# Altium PCB KeyBoard-RP2040.PcbDoc
Units mil, origin at the board's own origin, x right, y up, seen from the top; angles counter-clockwise.
Board outline 6000 x 4000 mil, 2 copper layers (Top Layer, Bottom Layer); 101 components, 89 nets, 360 pads, 0 vias.
Unrouted connection lines stored in the file: 183.
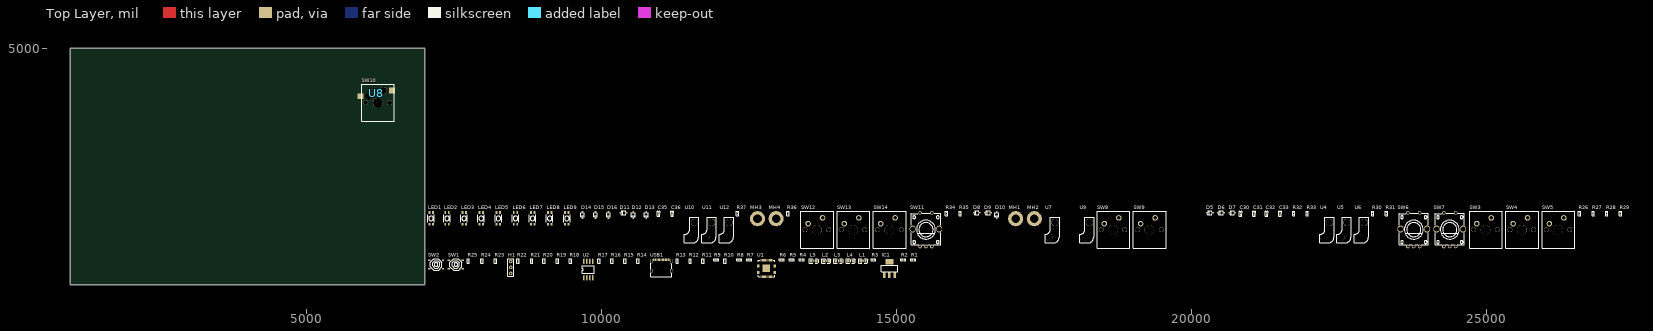
[diagram p0: Top Layer view]
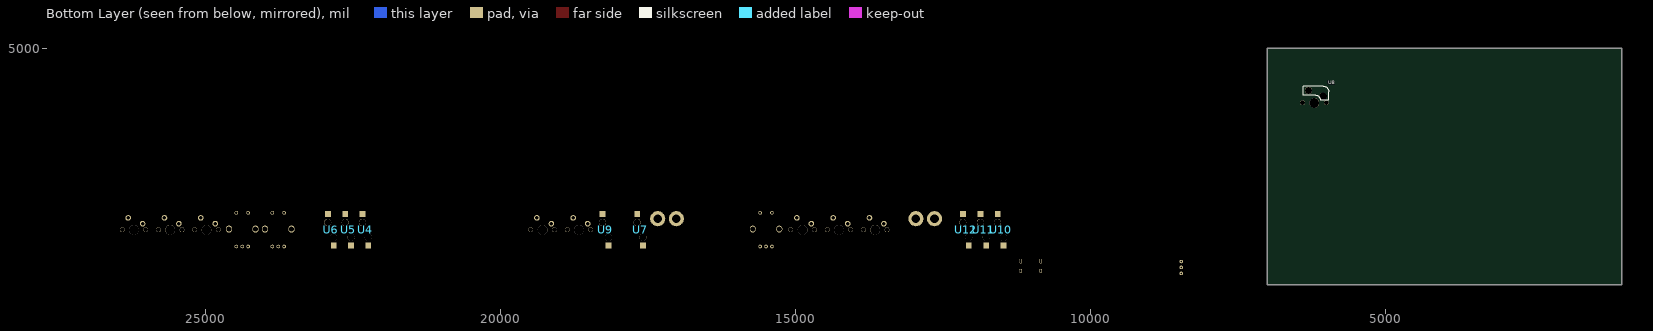
[diagram p1: Bottom Layer view, seen from below]

## Layer stack, top to bottom
Top Solder: solder mask 0.4, Solder Resist, Dk 3.5
Top Layer: signal copper 1.4
Dielectric 1: dielectric 12.6, FR-4, Dk 4.8
Bottom Layer: signal copper 1.4
Bottom Solder: solder mask 0.4, Solder Resist, Dk 3.5

## Board outline
1000,1000 7000,1000 7000,5000 1000,5000

## Design rules (kind name [scope] priority, off if disabled: settings)
Clearance [All] p1: gap=10 ignorepadtopadclearanceinfootprint=FALSE except(0: Arc-Hole Track-Hole SMDPad-Hole THPad-Hole Via-Hole Fill-Hole Poly-Hole Region-Hole Text-Hole)
PolygonConnect [All] p1: connectstyle=Relief reliefconductorwidth=10 reliefentries=4 polygonreliefangle="90 Angle" airgapwidth=10
RoomDefinition KeyBoard-RP2040_P2 [InComponentClass('KeyBoard-RP2040_P2')] p1: confinementstyle=ConfineIn formatcopy=TRUE lockcomponents=FALSE outline 7045,1600 27425,1600 27425,2355 7045,2355
RoomDefinition KeyBoard-RP2040_P1 [InComponentClass('KeyBoard-RP2040_P1')] p2: confinementstyle=ConfineIn formatcopy=TRUE lockcomponents=FALSE outline 7045,1060 15345,1060 15345,1550 7045,1550
RoutingVias [All] p1: holewidth=28 width=50 viastyle="Through Hole" minholewidth=28 minwidth=50 maxholewidth=28 maxwidth=50
SolderMaskExpansion [All] p1: expansion=4 istentingtop=FALSE
Width [All] p1: maxlimit=10 minlimit=10 preferedwidth=10
30 further rules are at their usual default settings.

## Classes and differential pairs
component class KeyBoard-RP2040_P2: C28 C29 C30 C31 C32 C33 C34 C35 C36 C37 C38 C39 C40 C41 C42 C43 C44 C45 D5 D6 D7 D8 D9 D10 D11 D12 D13 D14 D15 D16 LED1 LED2 LED3 LED4 LED5 LED6 LED7 LED8 LED9 MH1 MH2 MH3 MH4 R26 R27 R28 R29 R30 R31 R32 R33 R34 R35 R36 R37 SW3 SW4 SW5 SW6 SW7 SW8 SW9 SW10 SW11 SW12 SW13 SW14 U4 U5 U6 U7 U8 U9 U10 U11 U12
component class KeyBoard-RP2040_P1: C1 C2 C3 C4 C5 C6 C7 C8 C9 C10 C11 C12 C13 C14 C15 C16 C17 C18 C19 C20 C21 C22 C23 C24 C25 C26 C27 D1 D2 D3 D4 H1 IC1 L1 L2 L3 L4 L5 R1 R2 R3 R4 R5 R6 R7 R8 R9 R10 R11 R12 R13 R14 R15 R16 R17 R18 R19 R20 R21 R22 R23 R24 R25 SW1 SW2 U1 U2 U3 USB1 X1

## Components (designator, comment, footprint, x,y, rotation, side; value= is the part's Value field where it differs from the comment)
C30 "10nF" "SMD 0.79 0.54" 20825,2200 r90 top
C31 "10nF" "SMD 0.79 0.54" 21055,2200 r90 top
C32 "10nF" "SMD 0.79 0.54" 21265,2200 r90 top
C33 "10nF" "SMD 0.79 0.54" 21495,2200 r90 top
C35 "10nF" "SMD 0.79 0.54" 10965,2200 r90 top
C36 "10nF" "SMD 0.79 0.54" 11195,2200 r90 top
D5 "Diode" Diode 20305,2215 r0 top
D6 "Diode" Diode 20495,2215 r0 top
D7 "Diode" Diode 20685,2215 r0 top
D8 "Diode" Diode 16355,2215 r0 top
D9 "Diode" Diode 16545,2215 r0 top
D10 "Diode" Diode 16695,2180 r90 top
D11 "Diode" Diode 10370,2215 r0 top
D12 "Diode" Diode 10535,2180 r90 top
D13 "Diode" Diode 10755,2180 r90 top
D14 "Diode" Diode 9675,2180 r90 top
D15 "Diode" Diode 9895,2180 r90 top
D16 "Diode" Diode 10115,2180 r90 top
H1 "Header 3P 2.54" "Header 1x3" 8460,1290 r90 top
IC1 "LM3940IMP" LM39 14875,1270 r0 top
L1 "LED" LED 14430,1400 r0 top
L2 "R" LED 13805,1400 r0 top
L3 "G" LED 14010,1400 r0 top
L4 "B" LED 14220,1400 r0 top
L5 "LED" LED 13595,1400 r0 top
LED1 "SK6812MINI-E" LED-SK6812MINI-E 7110,2120 r90 top
LED2 "SK6812MINI-E" LED-SK6812MINI-E 7380,2120 r90 top
LED3 "SK6812MINI-E" LED-SK6812MINI-E 7670,2120 r90 top
LED4 "SK6812MINI-E" LED-SK6812MINI-E 7960,2120 r90 top
LED5 "SK6812MINI-E" LED-SK6812MINI-E 8250,2120 r90 top
LED6 "SK6812MINI-E" LED-SK6812MINI-E 8540,2120 r90 top
LED7 "SK6812MINI-E" LED-SK6812MINI-E 8830,2120 r90 top
LED8 "SK6812MINI-E" LED-SK6812MINI-E 9120,2120 r90 top
LED9 "SK6812MINI-E" LED-SK6812MINI-E 9410,2120 r90 top
MH1 "HOLE" Hole 17015,2115 r0 top
MH2 "HOLE" Hole 17330,2115 r0 top
MH3 "HOLE" Hole 12640,2115 r0 top
MH4 "HOLE" Hole 12955,2115 r0 top
R1 "200R" "SMD 0.566 0.54" 15280,1420 r0 top
R2 "1K" "SMD 0.566 0.54" 15110,1420 r0 top
R3 "1K" "SMD 0.566 0.54" 14605,1420 r0 top
R4 "1K" "SMD 0.566 0.54" 13390,1420 r0 top
R5 "1K" "SMD 0.566 0.54" 13220,1420 r0 top
R6 "1K" "SMD 0.566 0.54" 13050,1420 r0 top
R7 "27R" "SMD 0.566 0.54" 12500,1420 r0 top
R8 "27R" "SMD 0.566 0.54" 12330,1420 r0 top
R9 "27R" "SMD 0.566 0.54" 11940,1420 r0 top
R10 "27R" "SMD 0.566 0.54" 12090,1400 r90 top
R11 "100M" "SMD 0.566 0.54" 11720,1400 r90 top
R12 "27R" "SMD 0.566 0.54" 11500,1400 r90 top
R13 "1K" "SMD 0.566 0.54" 11280,1400 r90 top
R14 "1K" "SMD 0.566 0.54" 10615,1400 r90 top
R15 "1K" "SMD 0.566 0.54" 10395,1400 r90 top
R16 "5.1K" "SMD 0.566 0.54" 10175,1400 r90 top
R17 "5.1K" "SMD 0.566 0.54" 9955,1400 r90 top
R18 "27R" "SMD 0.566 0.54" 9475,1400 r90 top
R19 "1K" "SMD 0.566 0.54" 9255,1400 r90 top
R20 "1M" "SMD 0.566 0.54" 9025,1400 r90 top
R21 "1K" "SMD 0.566 0.54" 8815,1400 r90 top
R22 "10K" "SMD 0.566 0.54" 8585,1400 r90 top
R23 "100K" "SMD 0.566 0.54" 8200,1400 r90 top
R24 "1K" "SMD 0.566 0.54" 7970,1400 r90 top
R25 "1K" "SMD 0.566 0.54" 7740,1400 r90 top
R26 "10K" "SMD 0.566 0.54" 26570,2205 r90 top
R27 "10K" "SMD 0.566 0.54" 26800,2205 r90 top
R28 "10K" "SMD 0.566 0.54" 27030,2205 r90 top
R29 "10K" "SMD 0.566 0.54" 27260,2205 r90 top
R30 "10K" "SMD 0.566 0.54" 23065,2205 r90 top
R31 "10K" "SMD 0.566 0.54" 23295,2205 r90 top
R32 "10K" "SMD 0.566 0.54" 21725,2205 r90 top
R33 "10K" "SMD 0.566 0.54" 21955,2205 r90 top
R34 "10K" "SMD 0.566 0.54" 15845,2205 r90 top
R35 "10K" "SMD 0.566 0.54" 16075,2205 r90 top
R36 "10K" "SMD 0.566 0.54" 13160,2205 r90 top
R37 "10K" "SMD 0.566 0.54" 12300,2205 r90 top
SW1 "BUTTON" Button 7530,1340 r0 top
SW2 "BUTTON" Button 7195,1340 r0 top
SW3 "CPG151101S21" CPG151101S21 24975,1925 r0 top
SW4 "CPG151101S21" CPG151101S21 25590,1925 r0 top
SW5 "CPG151101S21" CPG151101S21 26205,1925 r0 top
SW6 "PEC12R-4120F-S0012" SW-encoder 23760,1930 r0 top
SW7 "PEC12R-4120F-S0012" SW-encoder 24370,1930 r0 top
SW8 "CPG151101S21" CPG151101S21 18665,1925 r0 top
SW9 "CPG151101S21" CPG151101S21 19280,1925 r0 top
SW10 "CPG151101S21" CPG151101S21 6205,4077.01 r0 top
SW11 "PEC12R-4120F-S0012" SW-encoder 15495,1930 r0 top
SW12 "CPG151101S21" CPG151101S21 13645,1925 r0 top
SW13 "CPG151101S21" CPG151101S21 14260,1925 r0 top
SW14 "CPG151101S21" CPG151101S21 14875,1925 r0 top
U1 "RP2040" RP2040 12790,1275 r0 top
U2 "W25Q128JVS" W25Q128JVS 9700,1115 r90 top
U4 "CPG151101S11" CPG151101S11 22320,1905 r90 top
U5 "CPG151101S11" CPG151101S11 22610,1905 r90 top
U6 "CPG151101S11" CPG151101S11 22905,1905 r90 top
U7 "CPG151101S11" CPG151101S11 17665,1905 r90 top
U8 "CPG151101S11" CPG151101S11 6160,4275 r0 bottom
U9 "CPG151101S11" CPG151101S11 18250,1905 r90 top
U10 "CPG151101S11" CPG151101S11 11555,1905 r90 top
U11 "CPG151101S11" CPG151101S11 11850,1905 r90 top
U12 "CPG151101S11" CPG151101S11 12145,1905 r90 top
USB1 "USB C" USB-C 11010,1325 r0 top

## Footprints (in the part's own frame and the unit in brackets; to place one, negate y for a bottom-side part, rotate by r counter-clockwise, add the part's x,y. Pads: shape width x height; smd on the part's side, far side on the other; paste and mask are expansions set on the pad)
Button [mm]
  rect 1x0.75 smd: 1(-3,1.85) 2(3,1.85) 3(-3,-1.85) 4(3,-1.85)
  silkscreen extent -2.54,-2.54 2.54,2.54
CPG151101S11 [mm]
  rect 2.55x2.5 smd far side: 1(-6.217,2.159) 2(7.296,-0.33)
  round 3 hole 3: ""(-2.667,2.159) ""(3.683,-0.381)
  silkscreen extent -5.08,-2.16 6.01,3.89, body extent -6.37,-2.2 8.15,3.75, height 3.22
CPG151101S21 [mm]
  round 2.413 hole 1.5: 1(-3.759,2.692) 2(2.464,5.182)
  round 2 hole 2: ""(-5.08,0.076) ""(5.08,0.076)
  round 4.2 hole 4.2: ""(0,0)
  silkscreen extent -6.86,-7.95 7.24,8.03, body extent -7,-7.72 6.95,7.88, height 15.25
Diode [mm]
  rect 1x0.75 smd: 1(-1.173,0) 2(1.173,0)
  silkscreen extent -0.9,-0.8 0.9,0.8
"Header 1x3" [mm]
  oval 1.5x1.524 hole 0.8: 1(-2.54,0) 2(0,0) 3(2.54,0)
  silkscreen extent -3.81,-1.27 3.81,1.27
Hole [mm]
  round 6.5 hole 3.7: 1(0,0)
LED [mm]
  rect 1x1.4 smd: 1(-1.05,0) 2(1.05,0)
  silkscreen extent -1.91,-1.02 2.03,1.02
LED-SK6812MINI-E [mm]
  rect 1.2x0.82 smd: 1(-2.5,0.75) 2(-2.5,-0.75) 3(2.5,0.75) 4(2.5,-0.75)
  silkscreen extent -1.6,-1.4 1.6,1.4
LM39 [mm]
  rect 1.05x2.465 smd: 1(-2.3,-2.731) 2(0,-2.731) 3(2.3,-2.731)
  rect 3.54x2.465 smd: 4(0,2.985)
  silkscreen extent -3.56,-1.27 3.56,1.52
RP2040 [mm]
  rect 1.1x0.2 smd: 1(-3.55,2.6) 2(-3.55,2.2) 3(-3.55,1.8) 4(-3.55,1.4) 5(-3.55,1) 6(-3.55,0.6) 7(-3.55,0.2) 8(-3.55,-0.2) 9(-3.55,-0.6) 10(-3.55,-1) 11(-3.55,-1.4) 12(-3.55,-1.8) 13(-3.55,-2.2) 14(-3.55,-2.6) 29(3.55,-2.6) 30(3.55,-2.2) 31(3.55,-1.8) 32(3.55,-1.4) 33(3.55,-1) 34(3.55,-0.6) 35(3.55,-0.2) 36(3.55,0.2) 37(3.55,0.6) 38(3.55,1) 39(3.55,1.4) 40(3.55,1.8) 41(3.55,2.2) 42(3.55,2.6)
  rect 0.2x1.1 smd: 15(-2.6,-3.55) 16(-2.2,-3.55) 17(-1.8,-3.55) 18(-1.4,-3.55) 19(-1,-3.55) 20(-0.6,-3.55) 21(-0.2,-3.55) 22(0.2,-3.55) 23(0.6,-3.55) 24(1,-3.55) 25(1.4,-3.55) 26(1.8,-3.55) 27(2.2,-3.55) 28(2.6,-3.55) 43(2.6,3.55) 44(2.2,3.55) 45(1.8,3.55) 46(1.4,3.55) 47(1,3.55) 48(0.6,3.55) 49(0.2,3.55) 50(-0.2,3.55) 51(-0.6,3.55) 52(-1,3.55) 53(-1.4,3.55) 54(-1.8,3.55) 55(-2.2,3.55) 56(-2.6,3.55)
  rect 3.2x3.2 smd: 57(0,0)
  round 0.254 on Top Overlay: ""(-3.937,3.175)
  silkscreen extent -3.56,-3.56 3.56,3.56, body extent -3.5,-3.5 3.5,3.5, height 0.9
"SMD 0.79 0.54" [mm]
  rect 0.79x0.54 smd: 1(-0.545,0) 2(0.545,0)
  silkscreen extent -1.15,-0.51 1.15,0.51
"SMD 0.566 0.54" [mm]
  rect 0.566x0.54 smd: 1(-0.433,0) 2(0.433,0)
  silkscreen extent -1.02,-0.51 1.02,0.51
SW-encoder [mm]
  round 1.524 hole 0.914: 1(-2.54,7.25) 2(2.54,7.25) 5(-2.54,-7.25) 6(0,-7.25) 7(2.54,-7.25)
  oval 2.6x3 hole 1.8 slot 2 at 0 deg: 3(-5.7,0.25) 4(5.7,0.25)
  silkscreen extent -6.25,-6.5 6.25,7.01
USB-C [mm]
  rect 0.55x1.1 smd: 1(-3.2,2.375) 2(-2.4,2.375) 11(2.4,2.375) 12(3.2,2.375)
  rect 0.3x1.1 smd: 3(-1.75,2.375) 3(-1.75,2.375) 4(-1.25,2.375) 5(-0.75,2.375) 6(-0.25,2.375) 7(0.25,2.375) 8(0.75,2.375) 9(1.25,2.375) 10(1.75,2.375)
  oval 1.2x1.8 hole 1.2 slot 0.6 at 0 deg: 13(-4.325,-2.375) 14(4.325,-2.375)
  oval 1.1x2 hole 1.5 slot 0.6 at 0 deg: 13(-4.325,1.825) 14(4.325,1.825)
  silkscreen extent -4.45,-4.92 4.45,0.89
W25Q128JVS [mm]
  oval 2.25x0.63 smd: 1(0,0) 2(0,-1.27) 3(0,-2.54) 4(0,-3.81) 5(7.06,-3.81) 6(7.06,-2.54) 7(7.06,-1.27) 8(7.06,0)
  silkscreen extent 1.96,-4.44 5.1,0.64

## Part data
C30 C31 C32 C33 C35 C36: library part "CAP 10nF", "SMD"
D5 D6 D7 D8 D9 D10 D11 D12 D13 D14 D15 D16 SW1 SW2 U2: "SMD"
H1: library part "Header 1x3", "THT"
IC1: "SOP"
L1 L2 L3 L4 L5: library part LED2
LED1 LED2 LED3 LED4 LED5 LED6 LED7 LED8 LED9: library part LED-SK6812MINI-E, "RGB 3.7V~5.5V 0.6mA"
R1: library part "RES 200R", "SMD"
R2 R3 R4 R5 R6 R13 R14 R15 R19 R21 R24 R25: library part "RES 1K", "SMD"
R7 R8 R9 R10 R12 R18: library part "Res 27R", "SMD"
R11: library part "RES 100M", "SMD"
R16 R17: library part "RES 5.1K", "SMD"
R20: library part "RES 1M", "SMD"
R22 R26 R27 R28 R29 R30 R31 R32 R33 R34 R35 R36 R37: library part "RES 10K", "SMD"
R23: library part "RES 100K", "SMD"
SW3 SW4 SW5 SW8 SW9 SW10 SW12 SW13 SW14: library part SW-CPG151101S21
SW6 SW7 SW11: library part Encoder-PEC12R
U1: library part "Rasberry Pi Pico-RP2040", "RP2040 chip for Raspberry Pi Pico - ARM® Cortex®-M0+ MCU 32-Bit"
U4 U5 U6 U7 U8 U9 U10 U11 U12: library part SW-CPG151101S11

## Nets (pads, with @x,y where several pads share a name; then routed paths per layer and width w, separated by ;. In a path a pad name is that pad's centre, name@x,y a point inside that pad or via, vN(x,y) a via of type N, cw(c..) or ccw(c..) an arc to the next point about the centre after c; other vN are vias at no path point)
+3V3: IC1.3 L2.1 L3.1 L4.1 R1.1 R3.2 R22.2 R23.2 R26.2 R27.2 R28.2 R29.2 R34.2 R35.2 U1.1 U1.10 U1.22 U1.33 U1.42 U1.44 U1.48 U1.49
+5: LED1.1 LED2.1 LED3.1 LED4.1 LED5.1 LED6.1 LED7.1 LED8.1 LED9.1
+5_USB: 
+5V_LEDS: R11.2
+5V_USB: IC1.1 R11.1 USB1.2 USB1.11
COL0: R7.2 U4.1 U7.1 U10.1
COL0_R: R7.1 U1.2
COL1: R8.2 SW6.2 U5.1 U8.1 U11.1
COL1_R: R8.1 U1.3
COL2: R10.2 SW11.2 U6.1 U9.1 U12.1
COL2_R: R10.1 U1.4
COL3: SW7.2
CON_USB_N: R9.1 USB1.5 USB1.7
CON_USB_P: R12.1 USB1.6 USB1.8
ENC1_SW: D14.2 SW6.1
ENC2_SW: D15.2 SW11.1
ENC3_SW: D16.2 SW7.1
GND: C30.1 C31.1 C32.1 C33.1 C35.1 C36.1 H1.2 IC1.2 IC1.4 L1.2 L5.2 LED1.3 LED2.3 LED3.3 LED4.3 LED5.3 LED6.3 LED7.3 LED8.3 LED9.3 MH1.1 MH2.1 MH3.1 MH4.1 R16.1 R17.1 SW1.1 SW1.2 SW2.1 SW2.2 SW6.3 SW6.4 SW6.6 SW7.3 SW7.4 SW7.6 SW11.3 SW11.4 SW11.6 U1.19 U1.57 USB1.1 USB1.12 USB1.13 USB1.14
LED0_BUF: R18.2
LED0_RES: R18.1 U1.36
NetC14_2: R1.2 U1.43
NetC15_2: U1.23 U1.50
NetC26_2: R20.2 U1.20
NetC27_2: R21.1
NetC30_2: C30.2 R32.1 U1.18
NetC31_2: C31.2 R30.1 U1.17
NetC32_2: C32.2 R33.1 U1.30
NetC33_2: C33.2 R31.1 U1.29
NetC35_2: C35.2 R37.1 U1.28
NetC36_2: C36.2 R36.1 U1.27
NetD5_1: D5.1 D6.1 D7.1 R13.2
NetD5_2: D5.2 U4.2
NetD6_2: D6.2 U5.2
NetD7_2: D7.2 U6.2
NetD8_1: D8.1 D9.1 D10.1 R14.2
NetD8_2: D8.2 U7.2
NetD9_2: D9.2 U8.2
NetD10_2: D10.2 U9.2
NetD11_1: D11.1 D12.1 D13.1 R15.2
NetD11_2: D11.2 U10.2
NetD12_2: D12.2 U11.2
NetD13_2: D13.2 U12.2
NetD14_1: D14.1 D15.1 D16.1 R19.2
NetL1_1: L1.1 R2.1
NetL2_2: L2.2 R4.1
NetL3_2: L3.2 R5.1
NetL4_2: L4.2 R6.1
NetL5_1: L5.1 R3.1
NetLED1_2: LED1.2 LED2.4
NetLED1_4: LED1.4
NetLED2_2: LED2.2 LED3.4
NetLED3_2: LED3.2 LED4.4
NetLED4_2: LED4.2 LED5.4
NetLED5_2: LED5.2 LED6.4
NetLED6_2: LED6.2 LED7.4
NetLED7_2: LED7.2 LED8.4
NetLED8_2: LED8.2 LED9.4
NetR16_2: R16.2 USB1.4
NetR17_2: R17.2 USB1.10
NetR20_1: R20.1 R21.2 U1.21
NetR22_1: R22.1 R24.1 SW1.3 SW1.4
NetR23_1: R23.1 R25.1 SW2.3 SW2.4
NetR26_1: R26.1 R30.2 SW6.7
NetR27_1: R27.1 R32.2 SW6.5
NetR28_1: R28.1 R31.2 SW7.7
NetR29_1: R29.1 R33.2 SW7.5
NetR34_1: R34.1 R36.2 SW11.7
NetR35_1: R35.1 R37.2 SW11.5
QSPI_CSN: R25.2 U1.56
QSPI_SCLK: U1.52
QSPI_SD0: U1.53
QSPI_SD1: U1.55
QSPI_SD2: U1.54
QSPI_SD3: U1.51
RESET_N: R24.2 U1.26
ROW0_R: R13.1 U1.11
ROW1_R: R14.1 U1.12
ROW2_R: R15.1 U1.13
ROW3_R: R19.1 U1.14
SWCLK: H1.3 U1.24
SWDIO: U1.25
SWIO: H1.1
USB_N: R9.2 U1.47
USB_P: R12.2 U1.46
USER_LED1: U1.37
USER_LED2_B: R6.2 U1.40
USER_LED2_G: R5.2 U1.39
USER_LED2_R: R4.2 U1.38
UserLED: R2.2
pads on no net: LED9.2 SW3. SW3.1 SW3.2 SW4. SW4.1 SW4.2 SW5. SW5.1 SW5.2 SW8. SW8.1 SW8.2 SW9. SW9.1 SW9.2 SW10. SW10.1 SW10.2 SW12. SW12.1 SW12.2 SW13. SW13.1 SW13.2 SW14. SW14.1 SW14.2 U1. U1.5 U1.6 U1.7 U1.8 U1.9 U1.15 U1.16 U1.31 U1.32 U1.34 U1.35 U1.41 U1.45 U2.1 U2.2 U2.3 U2.4 U2.5 U2.6 U2.7 U2.8 U4. U5. U6. U7. U8. U9. U10. U11. U12. USB1.3 USB1.9